# Altium PCB UART_Module_TYPE2242.PcbDoc
Units mm, origin at the board's own origin, x right, y up, seen from the top; angles counter-clockwise.
Board outline 42 x 21.99 mm, 4 copper layers (Top Layer, Int1 (GND), Int2 (PWR), Bottom Layer), stack 0.77 mm thick; 35 components, 71 nets, 201 pads, 57 vias.
Unrouted connection lines stored in the file: 8.
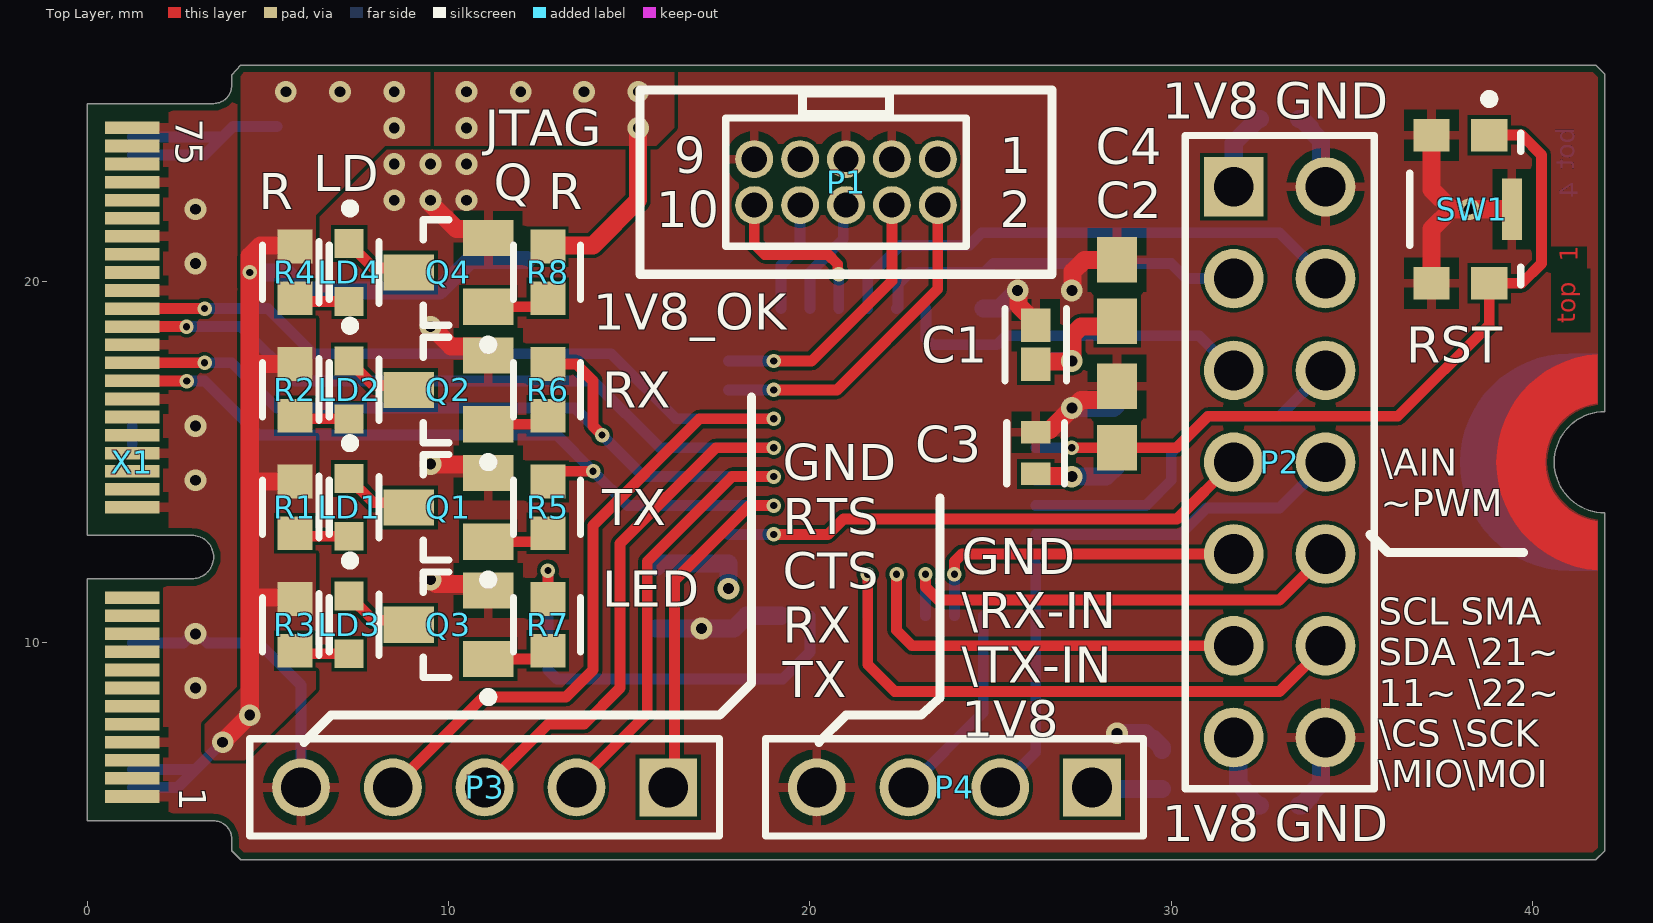
[diagram p0: Top Layer view]
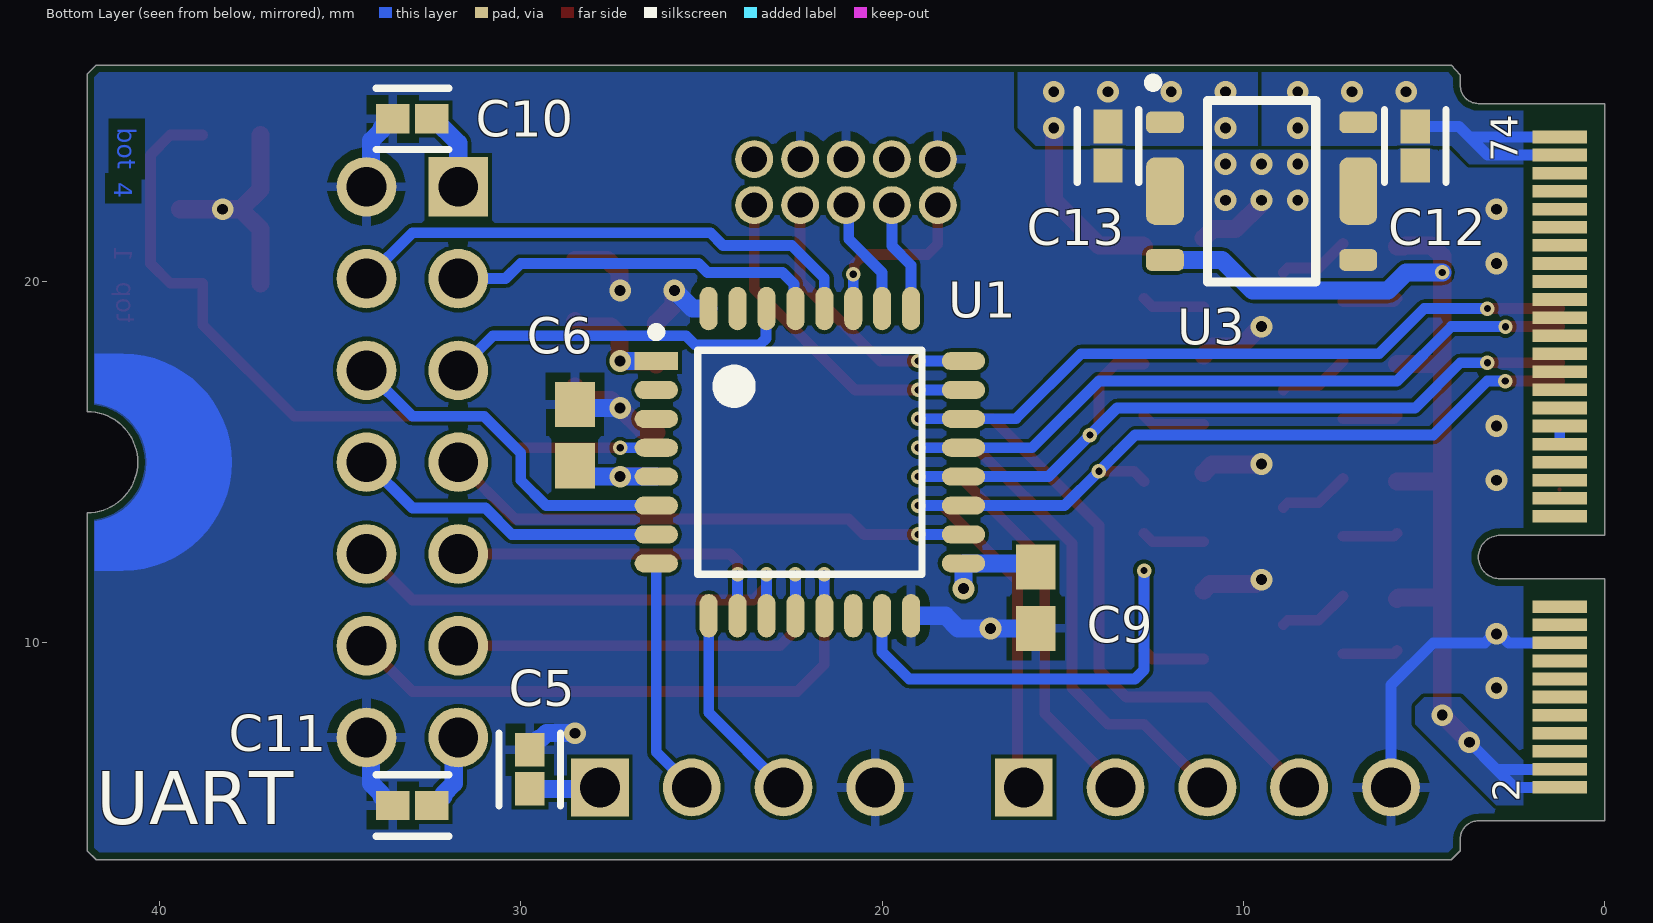
[diagram p1: Bottom Layer view, seen from below]
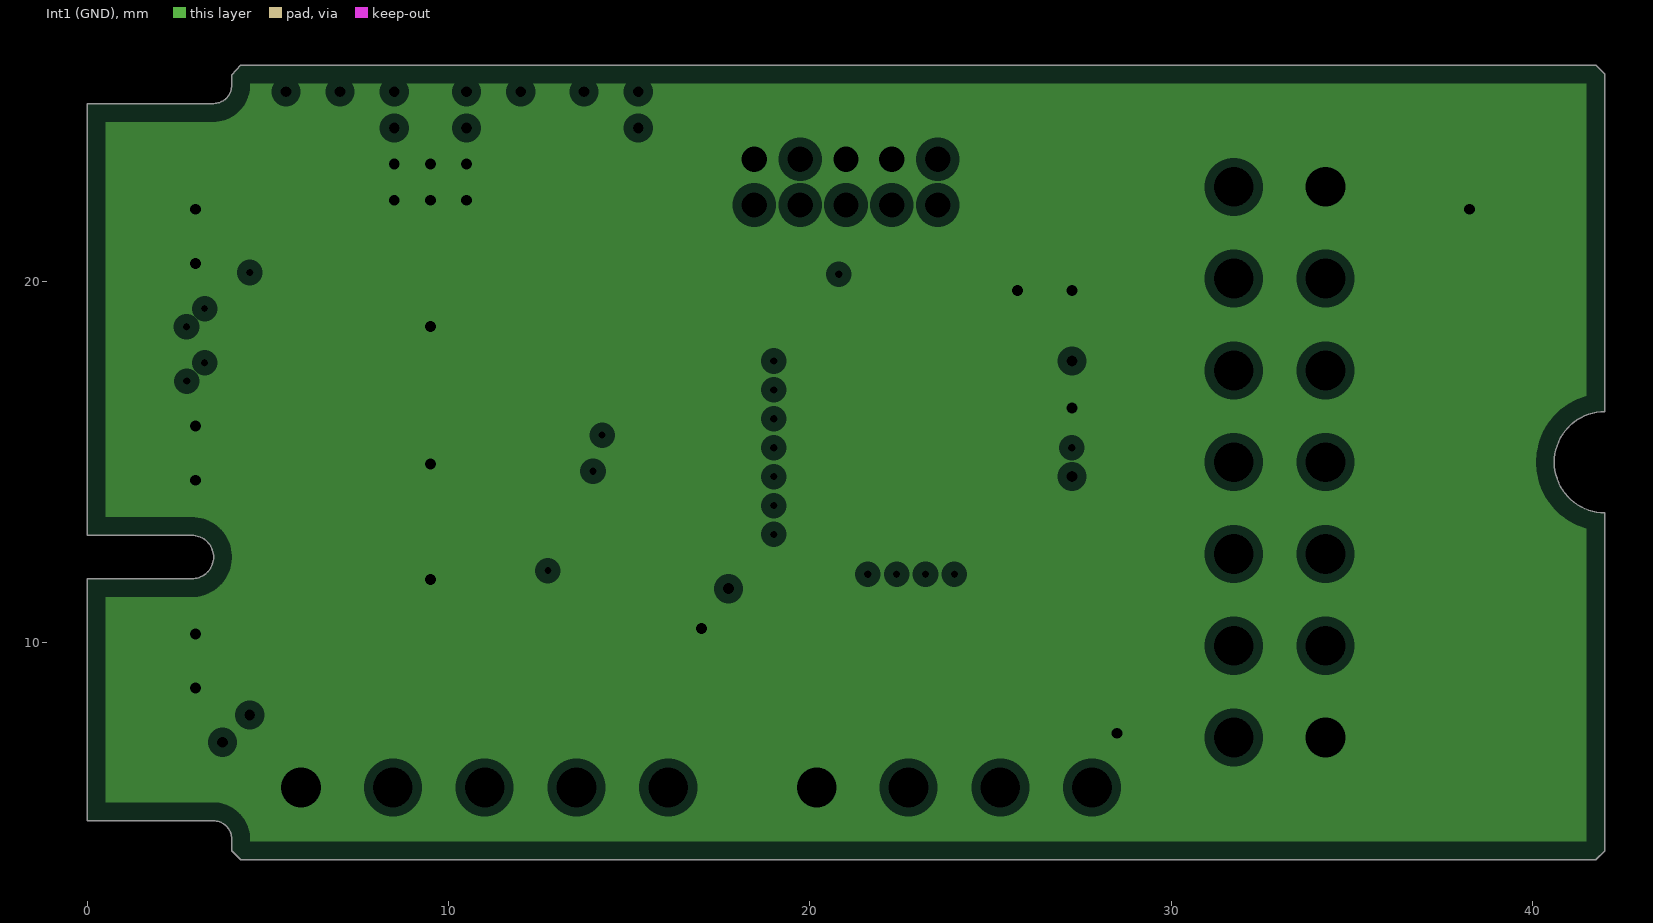
[diagram p2: Int1 (GND), clearances drawn from the general rule]
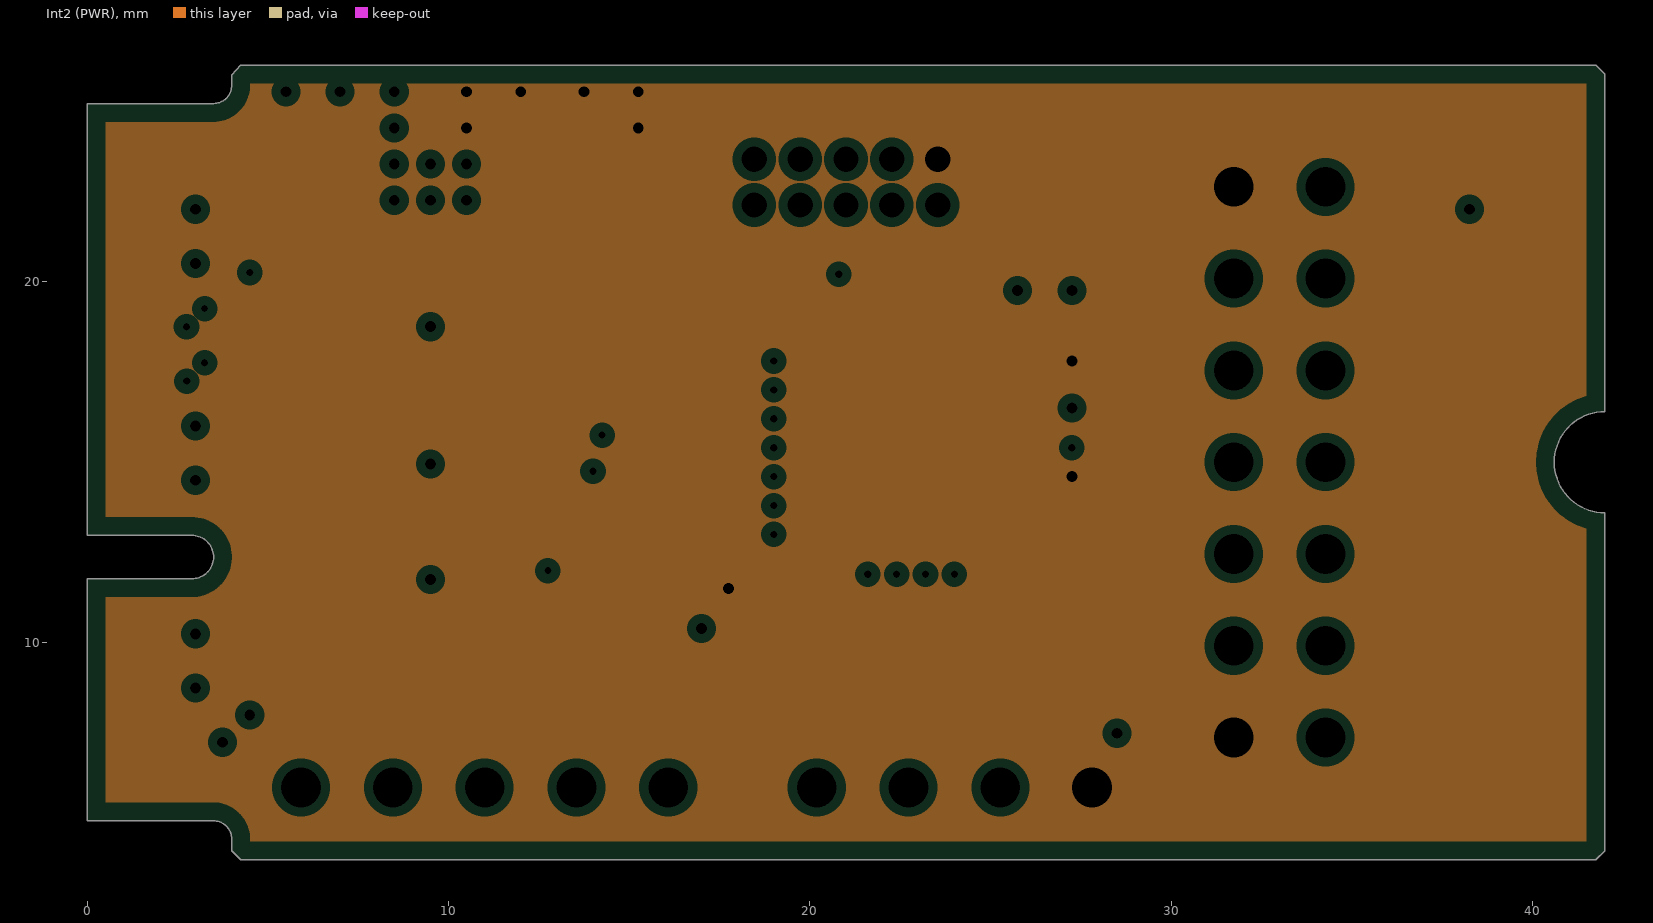
[diagram p3: Int2 (PWR), clearances drawn from the general rule]
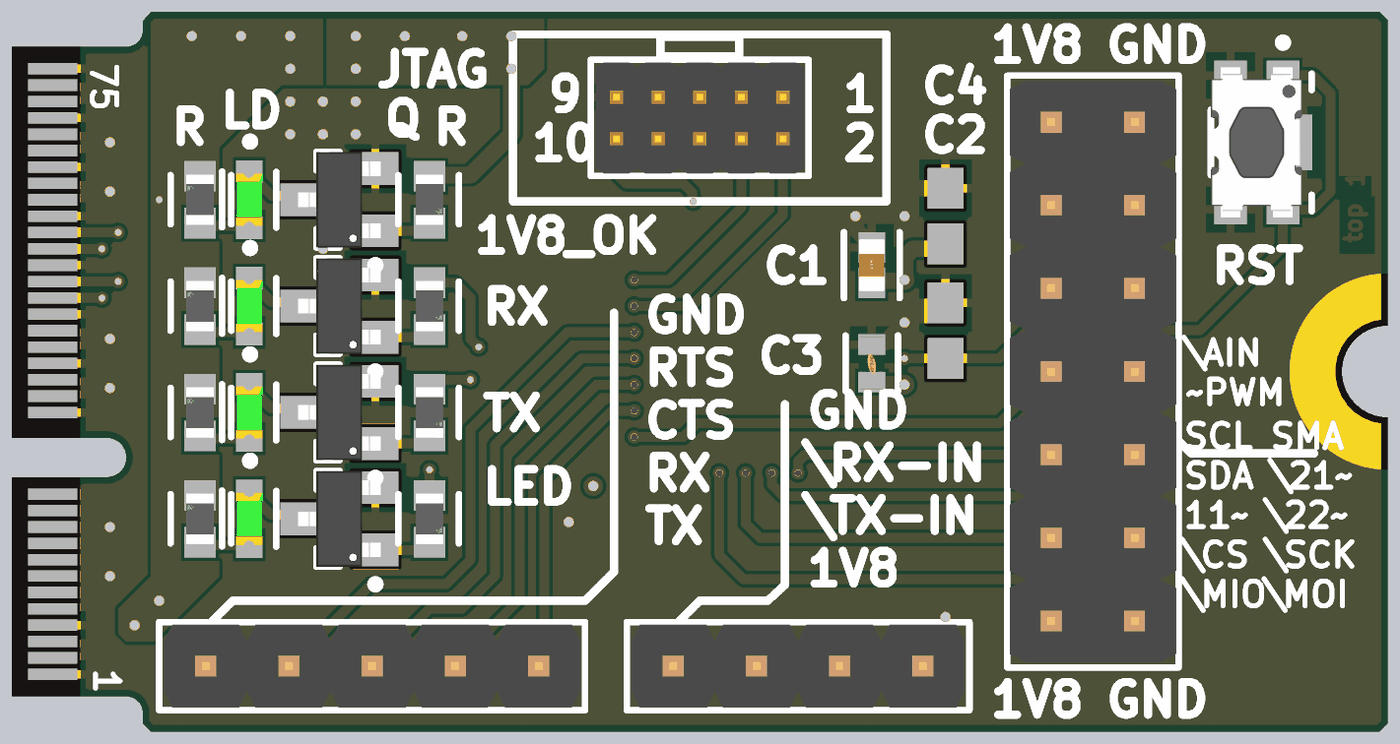
[diagram p4: 3D render of the assembled board from above, using the file's embedded part models]
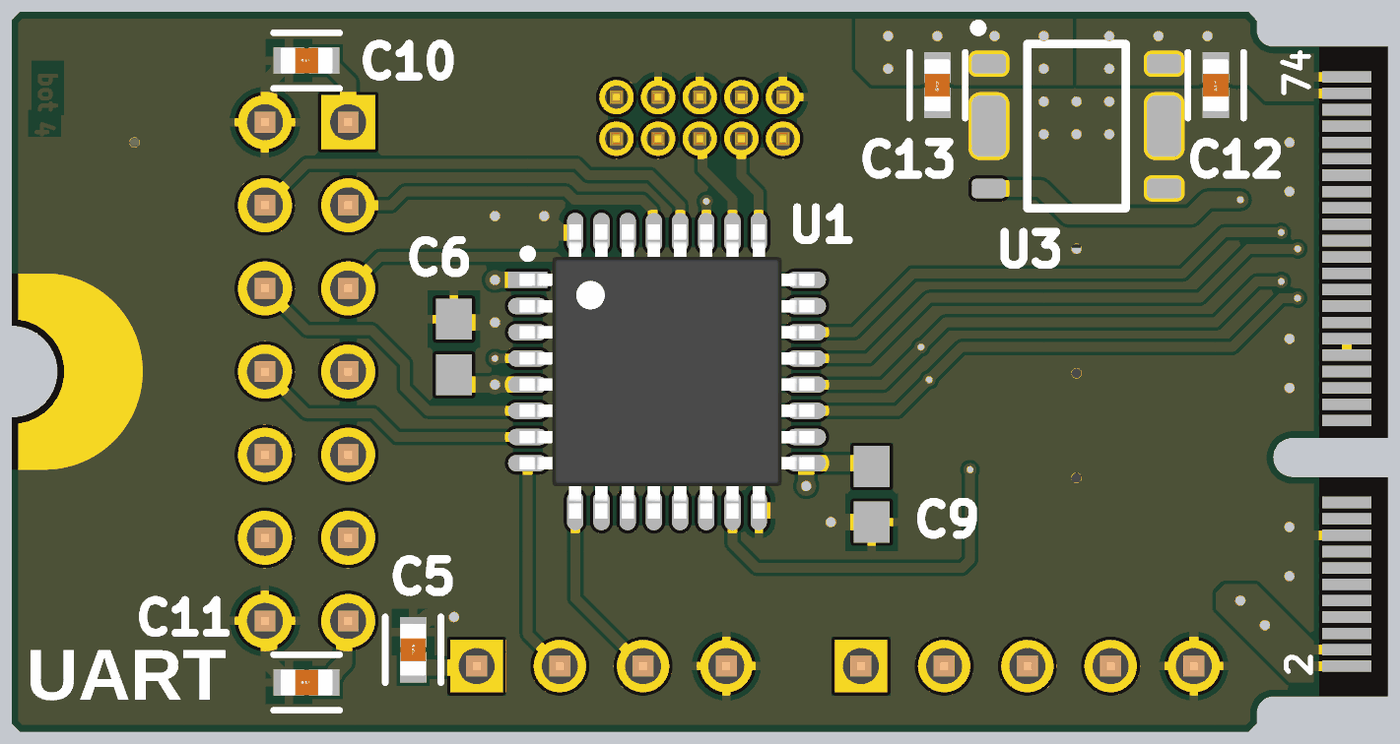
[diagram p5: 3D render of the assembled board from below, using the file's embedded part models]

## Layer stack, top to bottom
Top Solder: solder mask 0.0254, SM-001, Dk 4
Top Layer: signal copper 0.035
Dielectric 1: prepreg 0.1118, PP-015, Dk 4.3
Int1 (GND): plane copper 0.035, net GND
Dielectric 3: core 0.4064, Core-034, Dk 4.6
Int2 (PWR): plane copper 0.035, net 1V8
Dielectric 5: prepreg 0.1118, PP-015, Dk 4.3
Bottom Layer: signal copper 0.035
Bottom Solder: solder mask 0.0254, SM-001, Dk 4

## Board outline
4,4.25 4,4.575 ccw(c3.5,4.575) 3.5,5.075 0,5.075 0,11.775 2.9,11.775 ccw(c2.9,12.375) 3.5,12.375 ccw(c2.9,12.375) 2.9,12.975 0,12.975 0,24.925 3.5,24.925 ccw(c3.5,25.425) 4,25.425 4,25.713 4.25,25.988 41.75,25.988 42,25.738 42,16.4 ccw(c42,15) 40.6,15 ccw(c42,15) 42,13.6 42,4.25 41.75,4 4.25,4

## Design rules (kind name [scope] priority, off if disabled: settings)
BoardOutlineClearance [All] p1: gap=0.2 ignorepadtopadclearanceinfootprint=FALSE
Clearance [All] p1: gap=0.1 ignorepadtopadclearanceinfootprint=FALSE
DiffPairsRouting DiffPairsRouting_100R [InDifferentialPairClass('DP_100R')] p1: maxlimit=0.15 minlimit=0.15 mostfreqgap=0.15 toplayer_minwidth=0.11 toplayer_maxwidth=0.11 toplayer_prefwidth=0.11 bottomlayer_minwidth=0.11 bottomlayer_maxwidth=0.11 bottomlayer_prefwidth=0.11 impedanceprofiledriven=TRUE impedanceprofileid={D0ED966C-66EA-42B8-8657-787F2A77329B} impedanceprofilevalue=100.000000 maxuncoupledlength=12.7
DiffPairsRouting [All] p2: maxlimit=0.254 minlimit=0.254 mostfreqgap=0.254 toplayer_minwidth=0.381 toplayer_maxwidth=0.381 toplayer_prefwidth=0.381 bottomlayer_minwidth=0.381 bottomlayer_maxwidth=0.381 bottomlayer_prefwidth=0.381 maxuncoupledlength=12.7
MatchedLengths MatchedLengths_1 [InNetClass('S_GP2')] p1: tolerance=1 checknetsindiffpair=FALSE checkdiffpairvsdiffpair=TRUE checkxsignals=TRUE checkothers=TRUE
MatchedLengths [InNetClass('S_GP')] p2: tolerance=1 checknetsindiffpair=FALSE checkdiffpairvsdiffpair=TRUE checkxsignals=TRUE checkothers=TRUE
PlaneClearance [All] p1: clearance=0.254
PlaneConnect [All] p1: pad.planeconnectstyle=Relief pad.reliefexpansion=0.508 pad.reliefentries=4 pad.reliefconductorwidth=0.254 pad.reliefairgap=0.254 via.planeconnectstyle=Direct via.reliefexpansion=0.508 via.reliefentries=4 via.reliefconductorwidth=0.254 via.reliefairgap=0.254
PolygonConnect PolygonConnect_11 [All vs IsNamedPolygon('GND_L04_P020')] p1: thpad.connectstyle=Relief thpad.reliefconductorwidth=0.254 thpad.reliefentries=4 thpad.polygonreliefangle="90 Angle" thpad.airgapwidth=0.254 smdpad.connectstyle=Direct smdpad.reliefconductorwidth=0.254 smdpad.reliefentries=4 smdpad.polygonreliefangle="90 Angle" smdpad.airgapwidth=0.254 via.connectstyle=Direct via.reliefconductorwidth=0.254 via.reliefentries=4 via.polygonreliefangle="90 Angle" via.airgapwidth=0.254
PolygonConnect PolygonConnect_10 [All vs IsNamedPolygon('3V3_L04_P017')] p2: thpad.connectstyle=Relief thpad.reliefconductorwidth=0.254 thpad.reliefentries=4 thpad.polygonreliefangle="90 Angle" thpad.airgapwidth=0.254 smdpad.connectstyle=Direct smdpad.reliefconductorwidth=0.254 smdpad.reliefentries=4 smdpad.polygonreliefangle="90 Angle" smdpad.airgapwidth=0.254 via.connectstyle=Direct via.reliefconductorwidth=0.254 via.reliefentries=4 via.polygonreliefangle="90 Angle" via.airgapwidth=0.254
PolygonConnect PolygonConnect_9 [All vs IsNamedPolygon('1V8_L04_P018')] p3: thpad.connectstyle=Relief thpad.reliefconductorwidth=0.254 thpad.reliefentries=4 thpad.polygonreliefangle="90 Angle" thpad.airgapwidth=0.254 smdpad.connectstyle=Direct smdpad.reliefconductorwidth=0.254 smdpad.reliefentries=4 smdpad.polygonreliefangle="90 Angle" smdpad.airgapwidth=0.254 via.connectstyle=Direct via.reliefconductorwidth=0.254 via.reliefentries=4 via.polygonreliefangle="90 Angle" via.airgapwidth=0.254
PolygonConnect PolygonConnect_8 [All vs IsNamedPolygon('3V3_L01_P005')] p4: thpad.connectstyle=Relief thpad.reliefconductorwidth=0.254 thpad.reliefentries=4 thpad.polygonreliefangle="90 Angle" thpad.airgapwidth=0.254 smdpad.connectstyle=Direct smdpad.reliefconductorwidth=0.254 smdpad.reliefentries=4 smdpad.polygonreliefangle="90 Angle" smdpad.airgapwidth=0.254 via.connectstyle=Direct via.reliefconductorwidth=0.254 via.reliefentries=4 via.polygonreliefangle="90 Angle" via.airgapwidth=0.254
PolygonConnect PolygonConnect_7 [All vs IsNamedPolygon('NONET_L04_P011')] p5: thpad.connectstyle=Relief thpad.reliefconductorwidth=0.254 thpad.reliefentries=4 thpad.polygonreliefangle="90 Angle" thpad.airgapwidth=0.254 smdpad.connectstyle=Direct smdpad.reliefconductorwidth=0.254 smdpad.reliefentries=4 smdpad.polygonreliefangle="90 Angle" smdpad.airgapwidth=0.254 via.connectstyle=Direct via.reliefconductorwidth=0.254 via.reliefentries=4 via.polygonreliefangle="90 Angle" via.airgapwidth=0.254
PolygonConnect PolygonConnect_6 [All vs IsNamedPolygon('GND_L04_P014')] p6: thpad.connectstyle=Relief thpad.reliefconductorwidth=0.254 thpad.reliefentries=4 thpad.polygonreliefangle="90 Angle" thpad.airgapwidth=0.254 smdpad.connectstyle=Direct smdpad.reliefconductorwidth=0.254 smdpad.reliefentries=4 smdpad.polygonreliefangle="90 Angle" smdpad.airgapwidth=0.254 via.connectstyle=Direct via.reliefconductorwidth=0.254 via.reliefentries=4 via.polygonreliefangle="90 Angle" via.airgapwidth=0.254
PolygonConnect PolygonConnect_5 [All vs IsNamedPolygon('1V8_L04_P013')] p7: thpad.connectstyle=Relief thpad.reliefconductorwidth=0.254 thpad.reliefentries=4 thpad.polygonreliefangle="90 Angle" thpad.airgapwidth=0.254 smdpad.connectstyle=Direct smdpad.reliefconductorwidth=0.254 smdpad.reliefentries=4 smdpad.polygonreliefangle="90 Angle" smdpad.airgapwidth=0.254 via.connectstyle=Direct via.reliefconductorwidth=0.254 via.reliefentries=4 via.polygonreliefangle="90 Angle" via.airgapwidth=0.254
PolygonConnect PolygonConnect_4 [All vs IsNamedPolygon('3V3_L04_P011')] p8: thpad.connectstyle=Relief thpad.reliefconductorwidth=0.254 thpad.reliefentries=4 thpad.polygonreliefangle="90 Angle" thpad.airgapwidth=0.254 smdpad.connectstyle=Direct smdpad.reliefconductorwidth=0.254 smdpad.reliefentries=4 smdpad.polygonreliefangle="90 Angle" smdpad.airgapwidth=0.254 via.connectstyle=Direct via.reliefconductorwidth=0.254 via.reliefentries=4 via.polygonreliefangle="90 Angle" via.airgapwidth=0.254
PolygonConnect PolygonConnect_3 [All vs IsNamedPolygon('NONET_L04_P014')] p9: thpad.connectstyle=Relief thpad.reliefconductorwidth=0.254 thpad.reliefentries=4 thpad.polygonreliefangle="90 Angle" thpad.airgapwidth=0.254 smdpad.connectstyle=Direct smdpad.reliefconductorwidth=0.254 smdpad.reliefentries=4 smdpad.polygonreliefangle="90 Angle" smdpad.airgapwidth=0.254 via.connectstyle=Direct via.reliefconductorwidth=0.254 via.reliefentries=4 via.polygonreliefangle="90 Angle" via.airgapwidth=0.254
PolygonConnect PolygonConnect_2 [All vs IsNamedPolygon('NONET_L04_P013')] p10: thpad.connectstyle=Relief thpad.reliefconductorwidth=0.254 thpad.reliefentries=4 thpad.polygonreliefangle="90 Angle" thpad.airgapwidth=0.254 smdpad.connectstyle=Direct smdpad.reliefconductorwidth=0.254 smdpad.reliefentries=4 smdpad.polygonreliefangle="90 Angle" smdpad.airgapwidth=0.254 via.connectstyle=Direct via.reliefconductorwidth=0.254 via.reliefentries=4 via.polygonreliefangle="90 Angle" via.airgapwidth=0.254
PolygonConnect PolygonConnect_1 [All vs IsNamedPolygon('NONET_L04_P014')] p11: thpad.connectstyle=Relief thpad.reliefconductorwidth=0.254 thpad.reliefentries=4 thpad.polygonreliefangle="90 Angle" thpad.airgapwidth=0.254 smdpad.connectstyle=Direct smdpad.reliefconductorwidth=0.254 smdpad.reliefentries=4 smdpad.polygonreliefangle="90 Angle" smdpad.airgapwidth=0.254 via.connectstyle=Direct via.reliefconductorwidth=0.254 via.reliefentries=4 via.polygonreliefangle="90 Angle" via.airgapwidth=0.254
PolygonConnect [All] p12: thpad.connectstyle=Relief thpad.reliefconductorwidth=0.254 thpad.reliefentries=4 thpad.polygonreliefangle="90 Angle" thpad.airgapwidth=0.254 smdpad.connectstyle=Relief smdpad.reliefconductorwidth=0.254 smdpad.reliefentries=4 smdpad.polygonreliefangle="90 Angle" smdpad.airgapwidth=0.254 via.connectstyle=Direct via.reliefconductorwidth=0.254 via.reliefentries=4 via.polygonreliefangle="90 Angle" via.airgapwidth=0.254
RoutingVias [All] p1: holewidth=0.2 width=0.4 viastyle="Through Hole" minholewidth=0.2 minwidth=0.4 maxholewidth=3 maxwidth=6
SilkToSilkClearance [All] p1: silktosilkclearance=0.01
SolderMaskExpansion [All] p1: expansion=0.102 istentingtop=FALSE
Width Width_50R [InNetClass('SE_50R')] p1: maxlimit=0.172 minlimit=0.172 preferedwidth=0.172 impedanceprofiledriven=TRUE impedanceprofileid={CEA07893-88F1-4413-85C8-7467995CDE0A} impedanceprofilevalue=50.000000 minimp=50.000000 maximp=50.000000 favimp=50.000000
Width [All] p2: maxlimit=4 minlimit=0.3 preferedwidth=0.35
26 further rules are at their usual default settings.

## Classes and differential pairs
differential pair class DP_100R: FMC_GP_D1 FMC_GP_D2 FMC_GP_D3 FMC_GP_D4 FMC_GP_D5 FMC_GP_D6 FMC_GP_D7
net class SE_50R: FMC_GP_S0 FMC_GP_S1 FMC_GP_S2 FMC_GP_S3 FMC_GP_S4 FMC_GP_S5 FMC_GP_S6
net class S_GP: FMC_GP_S0 FMC_GP_S1 FMC_GP_S2 FMC_GP_S3 FMC_GP_S4 FMC_GP_S5 FMC_GP_S6
net class FMC_GP_S[0..7]: FMC_GP_S0 FMC_GP_S1 FMC_GP_S2 FMC_GP_S3 FMC_GP_S4 FMC_GP_S5 FMC_GP_S6 FMC_GP_S7
net class FMC_GP_D_P[0..7]: FMC_GP_D_P0 FMC_GP_D_P1 FMC_GP_D_P2 FMC_GP_D_P3 FMC_GP_D_P4 FMC_GP_D_P5 FMC_GP_D_P6 FMC_GP_D_P7
net class FMC_GP_D_N[0..7]: FMC_GP_D_N0 FMC_GP_D_N1 FMC_GP_D_N2 FMC_GP_D_N3 FMC_GP_D_N4 FMC_GP_D_N5 FMC_GP_D_N6 FMC_GP_D_N7
net class DP_GP: FMC_GP_D_N1 FMC_GP_D_N2 FMC_GP_D_N3 FMC_GP_D_N4 FMC_GP_D_N5 FMC_GP_D_N6 FMC_GP_D_N7 FMC_GP_D_P1 FMC_GP_D_P2 FMC_GP_D_P3 FMC_GP_D_P4 FMC_GP_D_P5 FMC_GP_D_P6 FMC_GP_D_P7
component class connector: X1
differential pair FMC_GP_D7: +FMC_GP_D_P7 -FMC_GP_D_N7
differential pair FMC_GP_D6: +FMC_GP_D_P6 -FMC_GP_D_N6
differential pair FMC_GP_D5: +FMC_GP_D_P5 -FMC_GP_D_N5
differential pair FMC_GP_D4: +FMC_GP_D_P4 -FMC_GP_D_N4
differential pair FMC_GP_D3: +FMC_GP_D_P3 -FMC_GP_D_N3
differential pair FMC_GP_D2: +FMC_GP_D_P2 -FMC_GP_D_N2
differential pair FMC_GP_D1: +FMC_GP_D_P1 -FMC_GP_D_N1

## Components (designator, comment, footprint, x,y, rotation, side; value= is the part's Value field where it differs from the comment)
C1 "4u7" FP-C1608-080-0_1-IPC_C 26.25,18.25 r270 top
C2 "100n" CAPC1608X90X35ML15T15 28.5,16.25 r270 top
C3 "1u" FP-CL10B105KO8NNNC-MFG 26.25,15.25 r90 top
C4 "100n" CAPC1608X90X35ML15T15 28.5,19.75 r270 top
C5 "4u7" FP-C1608-080-0_1-IPC_C 29.75,6.5 r270 bottom
C6 "100n" CAPC1608X90X35ML15T15 28.5,15.75 r270 bottom
C9 "100n" CAPC1608X90X35ML15T15 15.75,11.25 r90 bottom
C10 "4u7" FP-C1608-080-0_1-IPC_C 33,24.5 r180 bottom
C11 "4u7" FP-C1608-080-0_1-IPC_C 33,5.5 r180 bottom
C12 "4u7" FP-C1608-080-0_1-IPC_C 5.25,23.75 r90 bottom
C13 "4u7" FP-C1608-080-0_1-IPC_C 13.75,23.75 r90 bottom
LD1 "Green" FP-150060VS75000-MFG 7.25,13.75 r270 top
LD2 "Green" FP-150060VS75000-MFG 7.25,17 r270 top
LD3 "Green" FP-150060VS75000-MFG 7.25,10.5 r270 top
LD4 "Green" FP-150060VS75000-MFG 7.25,20.25 r270 top
P1 "62201021121" 62201021121 21,22.75 r180 top
P2 "61301421121" 61301421121 33,15 r270 top
P3 "61300511121" 61300511121 11,6 r180 top
P4 "61300411121" 61300411121 24,6 r180 top
Q1 "BSS806" FAIR-SSOT3L-3_V 10,13.75 r180 top
Q2 "BSS806" FAIR-SSOT3L-3_V 10,17 r180 top
Q3 "BSS806" FAIR-SSOT3L-3_V 10,10.5 r180 top
Q4 "BSS806" FAIR-SSOT3L-3_V 10,20.25 r180 top
R1 "100r" FP-CRCW0603-e3-IPC_B 5.75,13.75 r90 top value=100R
R2 "100r" FP-CRCW0603-e3-IPC_B 5.75,17 r90 top value=100R
R3 "100r" FP-CRCW0603-e3-IPC_B 5.75,10.5 r90 top value=100R
R4 "100r" FP-CRCW0603-e3-IPC_B 5.75,20.25 r90 top value=100R
R5 "100r" FP-CRCW0603-e3-IPC_B 12.75,13.75 r270 top value=100R
R6 "100r" FP-CRCW0603-e3-IPC_B 12.75,17 r270 top value=100R
R7 "100r" FP-CRCW0603-e3-IPC_B 12.75,10.5 r270 top value=100R
R8 "100r" FP-CRCW0603-e3-IPC_B 12.75,20.25 r270 top value=100R
SW1 "KMR231GLFS" FP-KMR231GLFS-MFG 38,22 r270 top
U1 "STM32L412K8T6" STM32L412K8T6 22,15 r180 bottom
U3 "S-1172B18-E6T1U" S1172 9.5,22.5 r270 bottom
X1 "CONN PWR CARD EDGE PCB SLOT MALE" CON-67_0.5MM_PCB_SLOT 1.25,15 r270 top locked

## Footprints (in the part's own frame and the unit in brackets; to place one, negate y for a bottom-side part, rotate by r counter-clockwise, add the part's x,y. Pads: shape width x height; smd on the part's side, far side on the other; paste and mask are expansions set on the pad)
61300411121 [mm] "Pin Header, pitch 2.54 mm, THT, Vertical, single row, 4p"
  rect 1.6x1.6 hole 1.1: 1(-3.81,0)
  round 1.6 hole 1.1: 2(-1.27,0) 3(1.27,0) 4(3.81,0)
  silkscreen extent -5.23,-1.35 5.23,1.35, body extent -5.08,-1.27 5.08,1.27, height 8.57
61300511121 [mm] "Pin Header, pitch 2.54 mm, THT, Vertical, single row, 5p"
  rect 1.6x1.6 hole 1.1: 1(-5.08,0)
  round 1.6 hole 1.1: 2(-2.54,0) 3(0,0) 4(2.54,0) 5(5.08,0)
  silkscreen extent -6.5,-1.35 6.5,1.35, body extent -6.35,-1.27 6.35,1.27, height 8.57
61301421121 [mm] "Pin Header, pitch 2.54 mm, THT, Vertical, dual row, 14p"
  rect 1.65x1.65 hole 1.1: 1(-7.62,-1.27)
  round 1.65 hole 1.1: 2(-7.62,1.27) 3(-5.08,-1.27) 4(-5.08,1.27) 5(-2.54,-1.27) 6(-2.54,1.27) 7(0,-1.27) 8(0,1.27) 9(2.54,-1.27) 10(2.54,1.27) 11(5.08,-1.27) 12(5.08,1.27) 13(7.62,-1.27) 14(7.62,1.27)
  silkscreen extent -9.04,-2.62 9.04,2.62, body extent -8.89,-2.54 8.89,2.54, height 8.59
62201021121 [mm] "Pin Header, pitch 1.27 mm, THT, Vertical, dual row, 10p"
  round 1.05 hole 0.7: 1(-2.54,-0.635) 2(-2.54,0.635) 3(-1.27,-0.635) 4(-1.27,0.635) 5(0,-0.635) 6(0,0.635) 7(1.27,-0.635) 8(1.27,0.635) 9(2.54,-0.635) 10(2.54,0.635)
  silkscreen extent -3.32,-1.78 3.32,1.78, body extent -3.17,-1.7 3.18,1.7, height 5.33
CAPC1608X90X35ML15T15 [mm] "Chip Capacitor, 2-Leads, Body 1.60x0.81mm, IPC Low Density"
  rect 1.25x1.1 smd: 1(-0.85,0) 2(0.85,0)
  body extent -0.88,-0.48 0.87,0.48, height 0.9
CON-67_0.5MM_PCB_SLOT [mm] "Connector 67, 0.5mm pitch - No BOM"
  rect 0.35x1.5 smd: 1(9.25,0) 3(8.75,0) 5(8.25,0) 7(7.75,0) 9(7.25,0) 11(6.75,0) 13(6.25,0) 15(5.75,0) 17(5.25,0) 19(4.75,0) 21(4.25,0) 23(3.75,0) 33(1.25,0) 35(0.75,0) 37(0.25,0) 39(-0.25,0) 41(-0.75,0) 43(-1.25,0) 45(-1.75,0) 47(-2.25,0) 49(-2.75,0) 51(-3.25,0) 53(-3.75,0) 55(-4.25,0) 57(-4.75,0) 59(-5.25,0) 61(-5.75,0) 63(-6.25,0) 65(-6.75,0) 67(-7.25,0) 69(-7.75,0) 71(-8.25,0) 73(-8.75,0) 75(-9.25,0)
  rect 0.35x1.5 smd far side: 2(9,0) 4(8.5,0) 6(8,0) 8(7.5,0) 10(7,0) 12(6.5,0) 14(6,0) 16(5.5,0) 18(5,0) 20(4.5,0) 22(4,0) 32(1.5,0) 34(1,0) 36(0.5,0) 38(0,0) 40(-0.5,0) 42(-1,0) 44(-1.5,0) 46(-2,0) 48(-2.5,0) 50(-3,0) 52(-3.5,0) 54(-4,0) 56(-4.5,0) 58(-5,0) 60(-5.5,0) 62(-6,0) 64(-6.5,0) 66(-7,0) 68(-7.5,0) 70(-8,0) 72(-8.5,0) 74(-9,0)
FAIR-SSOT3L-3_V [mm] "SOT23, 3-Leads, Body 2.92x1.4mm, Pitch 0.95mm"
  rect 1.4x1 smd: 1(-1.1,0.95) 2(-1.1,-0.95) 3(1.1,0)
  silkscreen extent -1.23,-1.46 0.7,2.12, body extent -1.26,-1.46 1.26,1.46, height 1.12
FP-150060VS75000-MFG [mm]
  rect 0.8x0.8 smd paste+0 mask+0: 1(-0.8,0) 2(0.8,0)
  silkscreen extent -1.9,-0.83 0.85,0.82, body extent -1.3,-0.55 1.3,0.55, height 0.25
FP-C1608-080-0_1-IPC_C [mm]
  rect 0.931x0.812 smd paste+0 mask+0: 1(-0.541,0) 2(0.541,0)
  silkscreen extent -1.01,-0.85 1.01,0.85, body extent -0.8,-0.4 0.8,0.4, height 0.9
FP-CL10B105KO8NNNC-MFG [mm]
  rect 0.625x0.825 smd paste+0 mask+0: 1(-0.575,0) 2(0.575,0)
  silkscreen extent -0.85,-0.8 0.85,0.8, body extent -0.8,-0.4 0.8,0.4, height 0.91
FP-CRCW0603-e3-IPC_B [mm]
  rect 0.935x0.962 smd paste+0 mask+0: 1(-0.715,0) 2(0.715,0)
  silkscreen extent -0.75,-0.95 0.75,0.9, body extent -1.43,-0.73 1.43,0.73, height 0.25
FP-KMR231GLFS-MFG [mm]
  rect 0.9x1 smd paste+0 mask+0: 1(-2.05,0.8) 2(2.05,0.8) 3(-2.05,-0.8) 4(2.05,-0.8)
  rect 1.7x0.55 smd paste+0 mask+0: 5(0,1.425)
  silkscreen extent -3.17,-1.4 2.1,1.68, body extent -2.6,-1.5 2.6,1.8, height 0.25
S1172 [mm] "LDO 1V8"
  rrect50% 0.6x1.05 smd: 1(-1.905,-2.675) 3(1.905,-2.675) 4(1.905,2.675) 6(-1.905,2.675)
  rrect50% 1.87x1.05 smd: 2(0,-2.675) 5(0,2.675)
  silkscreen extent -3.13,-3.13 2.51,1.5
STM32L412K8T6 [mm] "LQFP, 32-Leads, Body 7,00x7,00mm, Pitch 0,80mm"
  rect 1.2x0.5 smd: 1(-4.25,2.8)
  oval 1.2x0.5 smd: 2(-4.25,2) 3(-4.25,1.2) 4(-4.25,0.4) 5(-4.25,-0.4) 6(-4.25,-1.2) 7(-4.25,-2) 8(-4.25,-2.8) 17(4.25,-2.8) 18(4.25,-2) 19(4.25,-1.2) 20(4.25,-0.4) 21(4.25,0.4) 22(4.25,1.2) 23(4.25,2) 24(4.25,2.8)
  oval 0.5x1.2 smd: 9(-2.8,-4.25) 10(-2,-4.25) 11(-1.2,-4.25) 12(-0.4,-4.25) 13(0.4,-4.25) 14(1.2,-4.25) 15(2,-4.25) 16(2.8,-4.25) 25(2.8,4.25) 26(2,4.25) 27(1.2,4.25) 28(0.4,4.25) 29(-0.4,4.25) 30(-1.2,4.25) 31(-2,4.25) 32(-2.8,4.25)
  silkscreen extent -4.38,-3.1 3.1,3.72, body extent -4.5,-4.5 4.5,4.5, height 1.6

## Part data
C1 C5 C10 C11 C12 C13: library part CMP-2000-04981-2, "Multilayer Ceramic Capacitors 4.7μF ±10% 16V X7R SMD 0603", Case Code (Imperial)=0603, Case Code (Metric)=1608, Dielectric=X5R, Dielectric Material=Ceramic, Manufacturer="Murata Electronics", Max Operating Temperature=85°C, Min Operating Temperature=-55°C, Package Quantity=1, Tolerance=10%, Voltage=16V, Case/Package=0603, Construction=Flat, Depth=0.8mm, Height=0.8mm, Lead Free="Lead Free", Length=1.6mm, Mount="Surface Mount", P\N=GRM188Z71C475KE21D, Packaging="Tape and Reel", REACH SVHC="No SVHC", RoHS Compliant=Yes, Series=C, Termination=SMD/SMT, Thickness=0.035inch, Voltage Rating=16V, Voltage Rating (DC)=16V, Weight=7.1E-05oz, Width=0.031inch
C2 C4 C6 C9: library part CMP-2006-04496-1, "Multilayer Ceramic Capacitors 100nF ±10% 16V X7R SMD 0603", Manufacturer=KEMET, Part Number=0603YC104KAZ2A, P\N=C0603C104K4RAC7867
C3: library part CMP-2000-06093-2, "Multilayer Ceramic Capacitors 1μF ±10% 16V X7R SMD 0603", Capacitance=1uF, Manufacturer=KEMET, Manufacturer Part Number=CL10B105KO8NNNC, Temperature="-55°C to +125°C", Temperature Characteristic=X7R, Temperature Coefficient=15%, Temperature Range High=+125°C, Temperature Range Low=-55°C, Tolerance=10%, Voltage Rating=16V, Automotive=No, Category=Cap, ComponentLink2Description=Datasheet, ComponentLink2URL=http://www.samsungsem.com/global/front/downloadcms.do?path=%2F%2Fglobal%2F%2Fsupport%2F%2Fproduct-search%2F%2Fmlcc%2F%2F__icsFiles%2F%2Fafieldfile%2F%2F2019%2F%2F06%2F%2F18&fileName=CL10B105KO8NNNC-19.pdf, Device Class L1="Passive Components", Device Class L2=Capacitors, Device Class L3="Ceramic Capacitors", Digikey Description="CAP CER 1UF 16V X7R 0603", Height=0.9mm, Ipc Land Pattern Name=CAPC16080X80, Lead Free=Yes, Material=Ceramic, Octopart=https://octopart.com/cl10b105ko8nnnc-samsung-19018973, P\N=C0603C105K4RAC7411, Package=CL10B105KO8NNNC, RoHS=TRUE
LD1 LD2 LD3 LD4: library part CMP-1426-00006-5, "LED GREEN CLEAR 0603 SMD", Case Code (Imperial)=0603, Case Code (Metric)=1608, Forward Current=20mA, Forward Voltage=2V, Lens Color=Colorless, Manufacturer="Wurth Elektronik", Max Operating Temperature=85°C, Min Operating Temperature=-40°C, Package Quantity=4000, Power Rating=72mW, Reverse Voltage (DC)=5V, Case/Package=0603, Color=Green, Dominant Wavelength=570nm, Height=0.8mm, Illumination Color=Green, Length=1.6mm, Lens Size=0.7mm, Lens Style=Rectangular, Lens Transparency=Clear, Luminous Intensity=40mcd, Mount="Surface Mount", Number of Pins=2, P\N=150060VS75003, Packaging="Cut Tape", RoHS Compliant=Yes, Series=WL-SMCW, Test Current=20mA, Viewing Angle=140°, Wavelength=570nm, Weight=0.000882oz, Width=0.8mm
P1: library part CMP-1502-00948-1, "THT Vertical Pin Header WR-PHD, Pitch 1.27 mm, Dual Row, 10 pins", Contact Resistance=20mOhm, Manufacturer="Wurth Elektronik", Operating Temperature=-40to105degC, Rated Current=1A, Withstanding Voltage=500VAC, Working Voltage=100VAC, Datasheet URL=https://katalog.we-online.de/em/datasheet/62201021121.pdf, Gender=Male, Manufacturer URL=http://www.we-online.de, Mounting Technology=THT, Orientation=Vertical, P\N=62201021121, Package Reference=62201021121, Packaging=Box, Part Number=62201021121, Pin Number=10, Pitch=1.27mm, Publisher=WurthElektronik, Row Number=Dual
P2: library part CMP-1502-01093-1, "THT Vertical Pin Header WR-PHD, Pitch 2.54 mm, Dual Row, 14 pins", Contact Resistance=20mOhm, Manufacturer="Wurth Elektronik", Operating Temperature=-40to105degC, Rated Current=3A, Withstanding Voltage=500VAC, Working Voltage=250VAC, Datasheet URL=https://katalog.we-online.de/em/datasheet/6130xx21121.pdf, Gender=Male, Manufacturer URL=http://www.we-online.de, Mounting Technology=THT, Orientation=Vertical, P\N=61301421121, Package Reference=61301421121, Packaging=Bag, Part Number=61301421121, Pin Number=14, Pitch=2.54mm, Publisher=WurthElektronik, Row Number=Dual
P3: library part CMP-1502-01068-1, "THT Vertical Pin Header WR-PHD, Pitch 2.54 mm, Single Row, 5 pins", Contact Resistance=20mOhm, Manufacturer="Wurth Elektronik", Operating Temperature=-40to105degC, Rated Current=3A, Withstanding Voltage=500VAC, Working Voltage=250VAC, Datasheet URL=https://katalog.we-online.de/em/datasheet/6130xx11121.pdf, Gender=Male, Manufacturer URL=http://www.we-online.de, Mounting Technology=THT, Orientation=Vertical, P\N=61300511121, Package Reference=61300511121, Packaging=Bag, Part Number=61300511121, Pin Number=5, Pitch=2.54mm, Publisher=WurthElektronik, Row Number=Single
P4: library part CMP-1502-01064-1, "THT Vertical Pin Header WR-PHD, Pitch 2.54 mm, Single Row, 4 pins", Contact Resistance=20mOhm, Manufacturer="Wurth Elektronik", Operating Temperature=-40to105degC, Rated Current=3A, Withstanding Voltage=500VAC, Working Voltage=250VAC, Datasheet URL=https://katalog.we-online.de/em/datasheet/6130xx11121.pdf, Gender=Male, Manufacturer URL=http://www.we-online.de, Mounting Technology=THT, Orientation=Vertical, P\N=61300411121, Package Reference=61300411121, Packaging=Bag, Part Number=61300411121, Pin Number=4, Pitch=2.54mm, Publisher=WurthElektronik, Row Number=Single
Q1 Q2 Q3 Q4: library part CMP-2000-06249-1, "MOSFET N-CH 20V 2.3A SOT23-3", Manufacturer="Infineon Technologies", Maximum Continuous Drain Current=1.7A, Maximum Drain Source Voltage=20V, Maximum Gate Source Voltage=±8V, Operating Temperature=-55to150°C, Package=3SuperSOT, Package Description="3-Pin Small Outline Transistor, Body 2.92 x 1.4 mm, Pitch 0.95 mm", Package Reference=SSOT3L, Package Version="Rev. 3, 05/2015", Category=MOSFET, Channel Mode=Enhancement, Channel Type=N, Datasheet URL=https://www.fairchildsemi.com/datasheets/FD/FDN335N.pdf, Datasheet Version="Rev. C, 04/1999", Manufacturer URL=https://www.fairchildsemi.com/, Mounting=SurfaceMount, Mounting Technology=SurfaceMount, P\N=BSS806NEH6327XTSA1, Package URL=https://www.fairchildsemi.com/package-drawings/MA/MA03B.pdf, Packaging=Tape&Reel, Rad Hard=No, RDS-on=0.07@4.5VOhm, Typical Fall Time=3ns, Typical Rise Time=8.5ns, Typical Turn-Off Delay Time=11ns, Typical Turn-On Delay Time=5ns
R1 R2 R3 R4 R5 R6 R7 R8: library part CMP-2000-03827-2, "RES Thick Film, 100Ω, 5%, 0.1W, 200ppm/°C, 0603", Case Code (Imperial)=0603, Case Code (Metric)=1608, Manufacturer="Panasonic Electronic Components", Max Operating Temperature=155°C, Max Power Dissipation=100mW, Min Operating Temperature=-55°C, Package Quantity=1, Temperature Coefficient=200ppm/°C, Tolerance=5%, Voltage Rating=75V, Case/Package=0603, Composition="Thick Film", Contact Plating=Tin, Depth=0.85mm, Features="Automotive AEC-Q200", Height=0.02inch, Length=1.55mm, Military Standard=Not, Number of Terminations=2, P\N=ERJ-3EKF1000V, Packaging="Tape and Reel", Power Rating=100mW, Radiation Hardening=No, Termination=SMD/SMT, Weight=7.1E-05oz, Width=0.85mm
SW1: library part CMP-2000-06516-3, "SWITCH TACTILE SPST-NO 0.05A 32V", Case/Package=SMD/SMT, Contact Current Rating=50mA, Contact Resistance=100mR, Insulation Resistance=1GR, Manufacturer=C&K, Max Operating Temperature=85°C, Max Voltage Rating (DC)=32V, Min Operating Temperature=-40°C, Operating Force=3N, Package Quantity=7000, Power Rating=1W, Actuator Length=0.5mm, Actuator Type=Standard, Contact Material=Silver, Contact Plating=Silver, Current Rating=50mA, Depth=4.6mm, Illumination Type=Non-Illuminated, Lead Free="Lead Free", Length=4.6mm, Max Current Rating=50mA, Mechanical Life=150000Cycles, Mount="Surface Mount", Orientation=Straight, P\N=KMR231GLFS, Packaging="Cut Tape", Radiation Hardening=No, REACH SVHC="No SVHC", Series=KMR2, Switch Function=Off-Mom, Switch Travel=0.25mm, Termination="Gull Wing", Throw Configuration=SPST, Voltage Rating (DC)=32V, Width=2.8mm
U1: "MCU 32-bit", Manufacturer=STMicroelectronics, P\N=STM32L412K8T6
U3: library part S1172, "LDO 1V8 fixed", Manufacturer="ABLIC Inc.", P\N=S-1172B18-E6T1U
X1: library part CMP-01224-1, "Mates with 2199119-4 - No BOM", Card Thickness=0.8mm, Card Type="Non Specified - Dual Edge", Gender=Male, Mates with=2199119-4, Number of Positions=67, Pitch=0.5mm

## Via types
v1: diameter 0.6, hole 0.3, Top Layer to Bottom Layer, tented both sides, 36 vias
v2: diameter 0.4, hole 0.2, Top Layer to Bottom Layer, tented both sides, 21 vias

## Nets (pads, with @x,y where several pads share a name; then routed paths per layer and width w, separated by ;. In a path a pad name is that pad's centre, name@x,y a point inside that pad or via, vN(x,y) a via of type N, cw(c..) or ccw(c..) an arc to the next point about the centre after c; other vN are vias at no path point)
1V8: C1.2 C3.1 C4.2 C5.2 C6.2 C9.2 C10.2 C11.2 C13.2 P1.1 P2.1 P2.13 P4.1 R8.1 U1.1 U1.5 U1.17 U3.1 | length 21.9
  Top Layer w0.3: C3.1 C3.1@26.306,14.619 ; v1@27.231,14.619 v1(27.25,14.6)
  Top Layer w0.5: R8.1 12.785,21 14,21 15.25,22.25 v1(15.25,24.25) ; C1.2 26.321,17.781 27.231,17.781 v1(27.25,17.8) 27.269,17.819 27.269,18.519 27.499,18.749 28.349,18.749 C4.2 ; C3.1@26.306,14.619 v1@27.231,14.619
  Bottom Layer w0.3: C9.2@15.5,12.1 C9.2@15.6,12.2
  Bottom Layer w0.5: C9.2 15.85,12.2 U1.17 v1(17.75,11.5) ; U1.5 v1(27.25,14.6) 28.2,14.6 C6.2 ; U1.1 v1(27.25,17.8) ; P4.1 27.851,5.959 C5.2 ; P2.13 31.854,7.256 31.854,6.105 32.144,5.816 32.144,5.756 32.4,5.5 C11.2 ; P2.1 31.73,23.83 32.4,24.5 C10.2
  other v1: 10.5,24.25 10.5,25.25 12,25.25 13.75,25.25 15.25,25.25
3V3: C12.2 R1.2 R2.2 R3.2 R4.2 U3.3 U3.6 X1.2 X1.4 X1.72 X1.74 | length 38.8
  Top Layer w0.3: 4.5,19.75 4.573,19.823
  Top Layer w0.5: v1(3.75,7.25) v1(4.5,8) 4.5,11.25 ; 4.5,19.75 4.5,17.75 ; 4.5,19.823 4.5,20.707 4.793,21 5.519,21 5.554,20.965 R4.2 ; R3.2 5.715,11.25 4.5,11.25 ; R1.2 4.535,14.465 4.5,14.5 ; R2.2 4.535,17.715 4.5,17.75 ; 4.5,11.25 4.5,14.5 ; 4.5,14.5 4.5,17.75
  Bottom Layer w0.3: X1.2 2.5,6 3,6.5 ; X1.4 3,6.5 ; X1.72 3.25,23.5 3.75,24 ; X1.74 3.75,24 ; v1(3.75,7.25) 3,6.5 ; C12.2 4.041,24.291 3.75,24
  Bottom Layer w0.5: v2(4.5,20.25) 5.5,20.25 6,19.75 9.75,19.75 10.595,20.595 U3.3
  other v1: 8.5,24.25 5.5,25.25 7,25.25 8.5,25.25
EXT_I2C_SCL: P2.3 U1.29 | length 10.4
  Bottom Layer w0.3: U1.29 22.438,19.288 22.438,19.933 22.755,20.25 24.834,20.25 25.084,20.5 30,20.5 30.42,20.08 P2.3
EXT_I2C_SDA: P2.5 U1.30 | length 9.9
  Bottom Layer w0.3: U1.30 23.214,19.236 23.214,18.426 23.39,18.25 25.18,18.25 25.43,18.5 30.77,18.5 P2.5
EXT_I2C_SMBA: P2.4 U1.28 | length 14.6
  Bottom Layer w0.3: U1.28 21.6,20.1 22.5,21 24.403,21 24.753,21.35 33,21.35 P2.4
EXT_SPI_CS: P2.9 U1.10 | length 9.3
  Top Layer w0.3: v2(24,11.9) 24,12.25 24.21,12.46 P2.9
  Bottom Layer w0.3: U1.10 v2(24,11.9)
EXT_SPI_MISO: P2.11 U1.12 | length 12.2
  Top Layer w0.3: v2(22.4,11.9) 22.4,10.35 22.83,9.92 P2.11
  Bottom Layer w0.3: U1.12 v2(22.4,11.9)
EXT_SPI_MOSI: P2.12 U1.13 | length 17.2
  Top Layer w0.3: v2(21.6,11.9) 21.6,9.4 22.35,8.65 33,8.65 P2.12
  Bottom Layer w0.3: U1.13 v2(21.6,11.9)
EXT_SPI_SCK: P2.10 U1.11 | length 13.2
  Top Layer w0.3: v2(23.2,11.9) 23.2,11.55 23.56,11.19 33,11.19 P2.10
  Bottom Layer w0.3: U1.11 v2(23.2,11.9)
EXT_TIM1_CH1: P2.7 U1.18 | length 14.8
  Top Layer w0.3: v2(19,13) 20.5,13 20.929,13.429 30.159,13.429 P2.7
  Bottom Layer w0.3: U1.18 v2(19,13)
EXT_TIM2_CH1: P2.6 U1.6 | length 10
  Bottom Layer w0.3: U1.6 29.3,13.8 30,14.5 30,15.25 31.02,16.27 33,16.27 P2.6
EXT_TIM2_CH2: P2.8 U1.7 | length 8.8
  Bottom Layer w0.3: U1.7 30.25,13 30.98,13.73 33,13.73 P2.8
EXT_UART_RX: P4.3 U1.9 | length 5.6
  Bottom Layer w0.3: P4.3 24.8,8.07 U1.9
EXT_UART_TX: P4.2 U1.8 | length 6.6
  Bottom Layer w0.3: P4.2 26.25,6.98 U1.8
FMC_12V: X1.38
FMC_ADJ: X1.40 X1.42 | length 0.5
  Bottom Layer w0.3: X1.40 X1.42
FMC_GP_D_N0: X1.5
FMC_GP_D_N1: X1.37
FMC_GP_D_N2: X1.43
FMC_GP_D_N3: P3.2 R6.1 U1.20 X1.49 | length 33.6
  Top Layer w0.3: X1.49 v2(3.25,17.75) ; R6.1 13.535,17.715 14,17.25 14,16 v2@14.231,15.769 ; P3.2 13.54,6.086 15.5,8.046 15.5,12.25 17.85,14.6 v2(19,14.6)
  Bottom Layer w0.3: v2(3.25,17.75) 4,17.75 5.25,16.5 13.5,16.5 v2(14.25,15.75) 15.4,14.6 U1.20 v2(19,14.6)
FMC_GP_D_N4: P3.4 U1.22 X1.55 | length 36.1
  Top Layer w0.3: X1.55 v2(3.25,19.25) ; P3.4 10.96,8.5 13.25,8.5 14,9.25 14,13.25 16.95,16.2 v2(19,16.2)
  Bottom Layer w0.3: v2(3.25,19.25) 5,19.25 6.25,18 14.5,18 16.3,16.2 U1.22 v2(19,16.2)
FMC_GP_D_N5: X1.61
FMC_GP_D_N6: X1.67
FMC_GP_D_N7: X1.73
FMC_GP_D_P0: X1.3
FMC_GP_D_P1: X1.35 | length 0
FMC_GP_D_P2: X1.41
FMC_GP_D_P3: P3.1 R5.1 U1.19 X1.47 | length 30
  Top Layer w0.11: v2@2.75,17.25 v2(2.755,17.245)
  Top Layer w0.3: X1.47 v2@2.75,17.25 ; R5.1 13.035,14.75 v2(14,14.75) ; P3.1 16.25,6.17 16.25,11.723 18.327,13.8 v2(19,13.8)
  Bottom Layer w0.3: v2(2.755,17.245) 3.255,17.245 4.75,15.75 13,15.75 v2(14,14.75) 14.95,13.8 U1.19 v2(19,13.8)
FMC_GP_D_P4: P3.3 U1.21 X1.53 | length 33.4
  Top Layer w0.3: X1.53 v2(2.75,18.75) ; P3.3 12.75,7.75 13.75,7.75 14.75,8.75 14.75,12.75 17.4,15.4 v2(19,15.4)
  Bottom Layer w0.3: v2(2.75,18.75) 4.25,18.75 5.75,17.25 14,17.25 15.85,15.4 U1.21 v2(19,15.4)
FMC_GP_D_P5: X1.59
FMC_GP_D_P6: X1.65
FMC_GP_D_P7: X1.71
FMC_GP_S0: X1.9
FMC_GP_S1: X1.11
FMC_GP_S2: X1.13
FMC_GP_S3: X1.15
FMC_GP_S4: X1.17
FMC_GP_S5: X1.19
FMC_GP_S6: X1.21
FMC_GP_S7: X1.23
GND: C1.1 C2.1 C3.2 C4.1 C5.1 C6.1 C9.1 C10.1 C11.1 C12.1 C13.1 P1.3 P1.5 P1.9 P2.2 P2.14 P3.5 P4.4 Q1.2 Q2.2 Q3.2 Q4.2 SW1.3 SW1.4 SW1.5 U1.16 U1.32 U3.2 U3.4 U3.5 X1.1 X1.7 X1.18 X1.33 X1.39 X1.45 X1.51 X1.57 X1.63 X1.69 X1.75 | length 39.6
  Top Layer w0.5: v1(9.5,11.75) 9.527,11.75 9.65,11.627 10.923,11.627 Q3.2 ; v1(9.5,14.95) 9.519,14.931 10.869,14.931 Q1.2 ; v1(9.5,18.75) 9.527,18.75 10.077,18.2 10.85,18.2 Q2.2 ; v1(9.5,22.25) 9.519,22.231 9.519,22.149 10.219,21.45 10.85,21.45 Q4.2 ; v1(25.75,19.75) 25.769,19.731 25.769,19.331 26.25,18.85 C1.1 ; C3.2 26.313,15.888 26.638,15.888 v1(27.25,16.5) 27.277,16.5 27.502,16.725 28.2,16.725 28.5,17.025 C2.1 ; v1@27.231,19.731 27.269,19.769 27.269,20.269 27.6,20.6 C4.1 ; SW1.4 37.2,21.45 37.75,22 ; SW1.3 37.2,22.55 37.75,22 ; SW1.5 37.75,22
  Bottom Layer w0.3: X1.18 2.669,10 v1@2.919,10.25 ; v1(3,10.25) 3.076,10.25 3.326,10 4.75,10 5.92,8.83 P3.5
  Bottom Layer w0.5: C9.1 v1(17,10.4) 17.9,10.4 18.25,10.75 U1.16 ; U1.32 25.25,19.25 v1(25.75,19.75) ; v1(27.25,16.5) 28.4,16.5 C6.1 ; v1(28.5,7.5) 29.291,7.5 29.434,7.356 29.494,7.356 29.75,7.1 C5.1 ; C11.1 33.6,5.5 33.856,5.756 33.856,5.816 34.146,6.105 34.146,7.256 P2.14 ; C10.1 33.6,24.5 33.856,24.244 33.856,24.184 34.146,23.895 34.146,22.744 P2.2
  other v1: 3,8.75 3,14.5 3,16 27.25,19.75 3,20.5 3,22 38.25,22 8.5,22.25 10.5,22.25 8.5,23.25 9.5,23.25 10.5,23.25
I2C_SCL: X1.60
I2C_SDA: X1.58
I2S_CLK: X1.8
I2S_IN: X1.14
I2S_OUT: X1.12
I2S_WS: X1.10
JTAG_RST: P1.10 U1.27 | length 4.6
  Top Layer w0.3: P1.10@18.46,21.865 18.46,21.04 18.75,20.75 20.5,20.75 20.771,20.479 20.771,20.229 v2(20.8,20.2)
  Bottom Layer w0.3: U1.27 v2(20.8,20.2)
JTAG_TCK-SWDCLK: P1.4 U1.24 | length 7.3
  Top Layer w0.3: v2(19,17.8) 20.05,17.8 22.27,20.02 P1.4@22.27,21.865
  Bottom Layer w0.3: U1.24 v2(19,17.8)
JTAG_TDI: P1.8 U1.25 | length 2.8
  Bottom Layer w0.3: U1.25 19.2,20.45 19.73,20.98 P1.8@19.73,21.865
JTAG_TDO-SWO: P1.6 U1.26 | length 3
  Bottom Layer w0.3: U1.26 20,20.25 20.924,21.174 20.924,21.789 P1.6@21,21.865
JTAG_TMS-SWDIO: P1.2 U1.23 | length 9
  Top Layer w0.3: v2(19,17) 20.75,17 23.54,19.79 P1.2@23.54,21.865
  Bottom Layer w0.3: U1.23 v2(19,17)
LED: R7.1 U1.15 | length 12.2
  Top Layer w0.3: R7.1 v2(12.75,12)
  Bottom Layer w0.3: v2(12.75,12) 12.75,9.25 13,9 19.25,9 20,9.75 U1.15
nALERT: X1.62
NetLD1_1: LD1.1 Q1.3 | length 2
  Top Layer w0.3: LD1.1 7.924,13.876 8.774,13.876 Q1.3
NetLD1_2: LD1.2 R1.1 | length 1.5
  Top Layer w0.3: R1.1 5.835,12.95 LD1.2
NetLD2_1: LD2.1 Q2.3 | length 2
  Top Layer w0.3: LD2.1 7.924,17.126 8.774,17.126 Q2.3
NetLD2_2: LD2.2 R2.1 | length 1.5
  Top Layer w0.3: R2.1 5.835,16.2 LD2.2
NetLD3_1: LD3.1 Q3.3 | length 2
  Top Layer w0.3: LD3.1 7.924,10.626 8.774,10.626 Q3.3
NetLD3_2: LD3.2 R3.1 | length 1.5
  Top Layer w0.3: R3.1 5.835,9.7 LD3.2
NetLD4_1: LD4.1 Q4.3 | length 2
  Top Layer w0.3: LD4.1 7.924,20.376 8.774,20.376 Q4.3
NetLD4_2: LD4.2 R4.1 | length 1.5
  Top Layer w0.3: R4.1 5.835,19.45 LD4.2
NetQ1_1: Q1.1 R5.2 | length 1.7
  Top Layer w0.3: Q1.1 12.515,12.8 R5.2
NetQ2_1: Q2.1 R6.2 | length 1.7
  Top Layer w0.3: Q2.1 12.515,16.05 R6.2
NetQ3_1: Q3.1 R7.2 | length 1.7
  Top Layer w0.3: Q3.1 12.515,9.55 R7.2
NetQ4_1: Q4.1 R8.2 | length 1.7
  Top Layer w0.3: Q4.1 12.515,19.3 R8.2
nLED1: X1.6
nLED2: X1.16
NRST: C2.2 SW1.1 SW1.2 U1.4 | length 21.5
  Top Layer w0.3: v2(27.25,15.4) C2.2 30.15,15.4 31.02,16.27 36.27,16.27 38.8,18.8 SW1.2 39.7,19.95 40.25,20.5 40.25,23.5 39.7,24.05 SW1.1
  Bottom Layer w0.3: U1.4 v2(27.25,15.4)
UART_RX: X1.32
UART_TX: X1.22
pads on no net: P1.7 U1.2 U1.3 U1.14 U1.31 X1.20 X1.34 X1.36 X1.44 X1.46 X1.48 X1.50 X1.52 X1.54 X1.56 X1.64 X1.66 X1.68 X1.70

## Polygon pours and split planes (outlines as drawn)
GND on Bottom Layer "NONET_L-01_P-001" (solid, pour order 21): 0,26 0,4 42,4 42,26
GND on Bottom Layer "GND_L04_P020" (solid, pour order 20): 2.25,23.25 4.25,23.25 4.75,23.75 15.75,23.75 16.25,23.25 16.25,21.5 15.75,21 10.5,21 9.5,20 2.25,20
1V8 on Bottom Layer "1V8_L04_P018" (solid, pour order 18): 9.5,26.5 9.5,23.75 15.75,23.75 16.25,24.25 16.25,26.5
3V3 on Bottom Layer "3V3_L04_P017" (solid, pour order 17): 9.5,23.75 9.5,27.75 2.25,27.75 2.25,23.25 3.75,23.25 4.25,23.75
3V3 on Bottom Layer "3V3_L04_P015" (solid, pour order 15): 2.25,6.75 2.25,5.5 3,5.5 5.25,7.75 5.25,8.25 5,8.5 4,8.5 3.75,8.25
GND on Top Layer "NONET_L-01_P-001" (solid, pour order 22): 0,26 0,4 42,4 42,26
1V8 on Top Layer "1V8_L01_P019" (solid, pour order 19): 9.5,27.25 9.5,23.75 15.75,23.75 16.25,24.25 16.25,27.25
3V3 on Top Layer "3V3_L01_P005" (solid, pour order 5): 9.5,23.75 8.25,23.75 6.331,21.831 6.331,8.723 4.358,6.75 3.5,6.75 3.25,7 3.25,7.75 4.25,8.75 4.25,26.75 9.5,26.75
1V8 on Int2 (PWR) (split plane): 41.49,16.839 41.445,16.828 41.269,16.765 41.099,16.685 40.939,16.588 40.788,16.477 40.649,16.351 40.523,16.212 40.412,16.061 40.315,15.901 40.235,15.731 40.172,15.555 40.126,15.373 40.099,15.187 40.09,15.003 40.09,15 40.09,14.997 40.099,14.813 40.126,14.627 40.172,14.445 40.235,14.269 40.315,14.099 40.412,13.939 40.523,13.788 40.649,13.649 40.788,13.523 40.939,13.412 41.099,13.315 41.269,13.235 41.445,13.172 41.49,13.161 41.49,4.51 4.51,4.51 4.51,4.575 4.51,4.584 4.502,4.707 4.476,4.836 4.433,4.962 4.375,5.08 4.301,5.19 4.214,5.289 4.115,5.376 4.005,5.45 3.887,5.508 3.761,5.551 3.632,5.577 3.509,5.585 3.5,5.585 0.51,5.585 0.51,11.265 2.9,11.265 2.902,11.265 3.045,11.274 3.187,11.302 3.325,11.349 3.455,11.413 3.576,11.494 3.685,11.59 3.781,11.699 3.862,11.82 3.926,11.95 3.973,12.088 4.001,12.23 4.01,12.373 4.01,12.375 4.01,12.377 4.001,12.52 3.973,12.662 3.926,12.8 3.862,12.93 3.781,13.051 3.685,13.16 3.576,13.256 3.455,13.337 3.325,13.401 3.187,13.448 3.045,13.476 2.902,13.485 2.9,13.485 0.51,13.485 0.51,24.415 3.5,24.415 3.509,24.415 3.632,24.423 3.761,24.449 3.887,24.492 4.005,24.55 4.115,24.624 4.214,24.711 4.301,24.81 4.375,24.92 4.433,25.038 4.476,25.164 4.502,25.293 4.51,25.416 4.51,25.425 4.51,25.477 41.49,25.477
GND on Int1 (GND) (split plane): 41.49,16.839 41.445,16.828 41.269,16.765 41.099,16.685 40.939,16.588 40.788,16.477 40.649,16.351 40.523,16.212 40.412,16.061 40.315,15.901 40.235,15.731 40.172,15.555 40.126,15.373 40.099,15.187 40.09,15.003 40.09,15 40.09,14.997 40.099,14.813 40.126,14.627 40.172,14.445 40.235,14.269 40.315,14.099 40.412,13.939 40.523,13.788 40.649,13.649 40.788,13.523 40.939,13.412 41.099,13.315 41.269,13.235 41.445,13.172 41.49,13.161 41.49,4.51 4.51,4.51 4.51,4.575 4.51,4.584 4.502,4.707 4.476,4.836 4.433,4.962 4.375,5.08 4.301,5.19 4.214,5.289 4.115,5.376 4.005,5.45 3.887,5.508 3.761,5.551 3.632,5.577 3.509,5.585 3.5,5.585 0.51,5.585 0.51,11.265 2.9,11.265 2.902,11.265 3.045,11.274 3.187,11.302 3.325,11.349 3.455,11.413 3.576,11.494 3.685,11.59 3.781,11.699 3.862,11.82 3.926,11.95 3.973,12.088 4.001,12.23 4.01,12.373 4.01,12.375 4.01,12.377 4.001,12.52 3.973,12.662 3.926,12.8 3.862,12.93 3.781,13.051 3.685,13.16 3.576,13.256 3.455,13.337 3.325,13.401 3.187,13.448 3.045,13.476 2.902,13.485 2.9,13.485 0.51,13.485 0.51,24.415 3.5,24.415 3.509,24.415 3.632,24.423 3.761,24.449 3.887,24.492 4.005,24.55 4.115,24.624 4.214,24.711 4.301,24.81 4.375,24.92 4.433,25.038 4.476,25.164 4.502,25.293 4.51,25.416 4.51,25.425 4.51,25.477 41.49,25.477

## Other copper
Top Layer:
  region net GND: 41.79,12.007 cw(c42,15) 41.79,17.993 41.79,16.637 ccw(c42,15) 41.79,13.363
  pour cut-out: 2.254,13.321 0.321,13.321 0,13 0,12.992 2.256,12.992
  text "1" at 41.25,20.55 h0.5 r90
  text "top" at 41.183,18.85 h0.5 r90
Bottom Layer:
  region net GND: 41,12 cw(c41,15) 41,18 41.79,18 41.79,16.637 ccw(c42,15) 41.79,13.363 41.79,12
  pour cut-out: 2.254,25 2.254,4 0,4 0,25
  text "bot" at 41.15,24.25 h0.5 r90
  text "4" at 41.25,22.75 h0.5 r90
Int1 (GND) (plane layer: these items are gaps in the copper):
  text "2" at 41.25,21.05 h0.5 r90
Int2 (PWR) (plane layer: these items are gaps in the copper):
  text "3" at 41.25,21.75 h0.5 r90

## Silkscreen, mask and mechanical layers (free items; w line width, h text height)
Top Overlay:
  lines w0.254: 6,7.25 6.75,8 17.5,8 18.385,8.885 18.385,16.796 ; 20.25,7.25 21,8 23.079,8 23.6,8.481 23.6,14 ; 35.5,13 36,12.5 39.75,12.5 ; 15.3,20.2 26.7,20.2 26.7,25.3 15.3,25.3 15.3,20.2 ; 19.8,24.625 22.2,24.625 22.2,25.225 19.8,25.225 19.8,24.625
  text "1V8 GND" at 29.754,24.504 h1
  text "JTAG" at 11.004,23.754 h1
  text "LD" at 6.254,22.504 h1
  text "Q" at 11.254,22.254 h1
  text "R" at 4.754,22.004 h1
  text "R" at 12.754,22.004 h1
  text "1V8_OK" at 14.004,18.671 h1
  text "RST" at 36.504,17.754 h1
  text "RX" at 14.254,16.504 h1
  text "\AIN / ~PWM" at 35.8,13.5 h0.75
  text "TX" at 14.254,13.254 h1
  text "LED" at 14.254,11.004 h1
  text "GND / RTS / CTS / RX / TX" at 19.25,8.5 h1
  text "GND / \RX-IN / \TX-IN / 1V8" at 24.2,7.4 h1
  text "SCL SMA / SDA \21~ / 11~ \22~ / \CS \SCK / \MIO\MOI" at 35.743,6 h0.75
  text "1V8 GND" at 29.754,4.504 h1
Bottom Overlay:
  text "UART" at 41.75,4.5 h2.5
Top Solder:
  region: 42,12 cw(c42,15) 42,18
Bottom Solder:
  region: 41,12 cw(c41,15) 41,18 42,18 42,12
Mechanical 4:
  the board outline again, w0
Mechanical 6:
  lines w0.1: 29,4 29.75,4 30,4.25 ; 29,26 29.75,26 30,25.75 ; 29.75,0 30,0.25 30,4.25 ; 29.75,30 30,29.75 30,25.75 ; 4,4.25 4,0.25 4.25,0 41.75,0 42,0.25 42,4.25 ; 4,4.25 4,4.575 ccw(c3.5,4.575) 3.5,5.075 0,5.075 0,11.775 2.9,11.775 ccw(c2.9,12.375) 3.5,12.375 ccw(c2.9,12.375) 2.9,12.975 0,12.975 0,24.925 3.5,24.925 ccw(c3.5,25.425) 4,25.425 4,25.75 ; 4,4.25 4.25,4 5,4 41,4 41.75,4 42,4.25 ; 4,25.75 4,29.75 4.25,30 41.75,30 42,29.75 42,25.75 ; 4,25.75 4.25,26 5,26 41,26 41.75,26 42,25.75 ; 27,15 cw(c30,15) 30,18 ; 27,15 ccw(c30,15) 30,12 ; 27,15 27,15 ; 30,4.25 30,13.6 ; 30,12 30,13.6 ; 30,12 29,12 cw(c29,15) 26,15 cw(c29,15) 29,18 30,18 ; 30,13.6 cw(c30,15) 28.6,15 cw(c30,15) 30,16.4 ; 30,16.4 30,25.75 ; 30,16.4 30,18 ; 39,15 ccw(c42,15) 42,12 ; 39,15 cw(c42,15) 42,18 ; 39,15 39,15 ; 42,4.25 42,13.6 ; 42,12 42,13.6 ; 42,12 41,12 cw(c41,15) 38,15 cw(c41,15) 41,18 42,18 ; 42,13.6 cw(c42,15) 40.6,15 cw(c42,15) 42,16.4 ; 42,16.4 42,18 ; 42,16.4 42,25.75
  text "TYPE2230" at 21.35,4.35 h1
  text "TYPE2242" at 33.35,4.35 h1
  text "TYPE3030" at 21.35,0.35 h1
  text "TYPE3042" at 33.35,0.35 h1

## Text inside footprints (layer, text, board x,y; h text height)
P1: Top Overlay "2" at 25.25,21.5 h1; Top Overlay "1" at 25.25,23 h1; Top Overlay "10" at 15.75,21.5 h1; Top Overlay "9" at 16.25,23 h1
X1: Mechanical 1 "Board Edge" at -1.65,19 h0.8 r270; Mechanical 1 "All pads hard gold finished" at 0.05,29.8 h0.5 r270; Mechanical 1 "Final Board Thickness: 0.8 +-0.08mm" at -3.85,24.3 h0.8 r270; Mechanical 1 "20-degree chamfered border from this line" at -5.15,5 h0.5 r270; Top Overlay "75" at 2.45,24.5 h0.75 r270; Top Overlay "1" at 2.55,6 h0.75 r270; Bottom Overlay "2" at 2.35,5.6 h0.75 r270; Bottom Overlay "74" at 2.415,23.318 h0.75 r270